# Altium PCB PCB5.PcbDoc
Units mil, origin at the board's own origin, x right, y up, seen from the top; angles counter-clockwise.
Board outline 1335 x 1970 mil, 2 copper layers (Top Layer, Bottom Layer); 19 components, 18 nets, 77 pads, 9 vias.
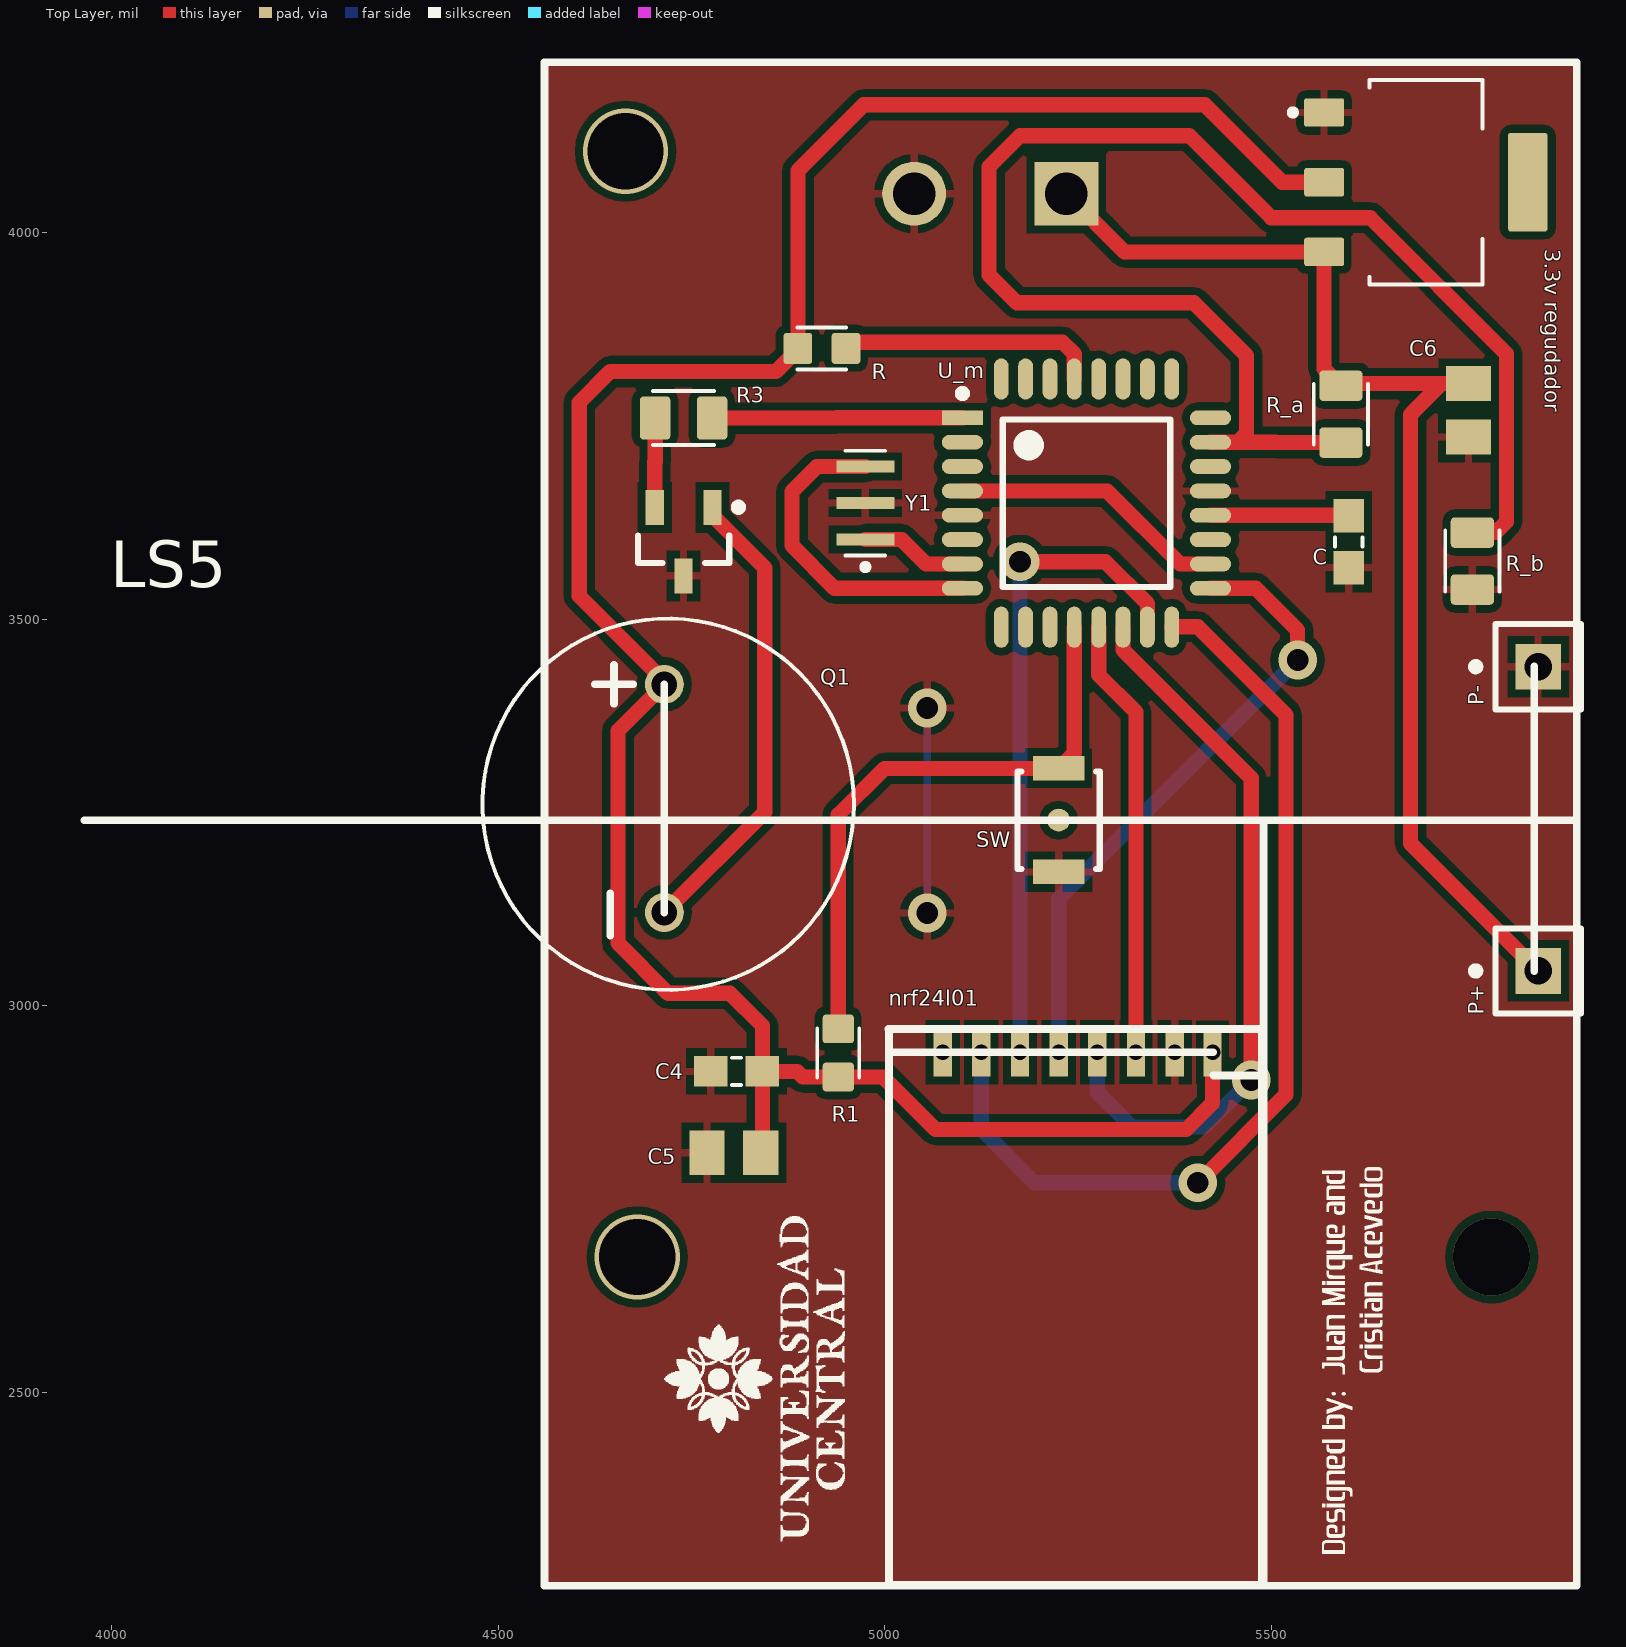
[diagram p0: Top Layer view]
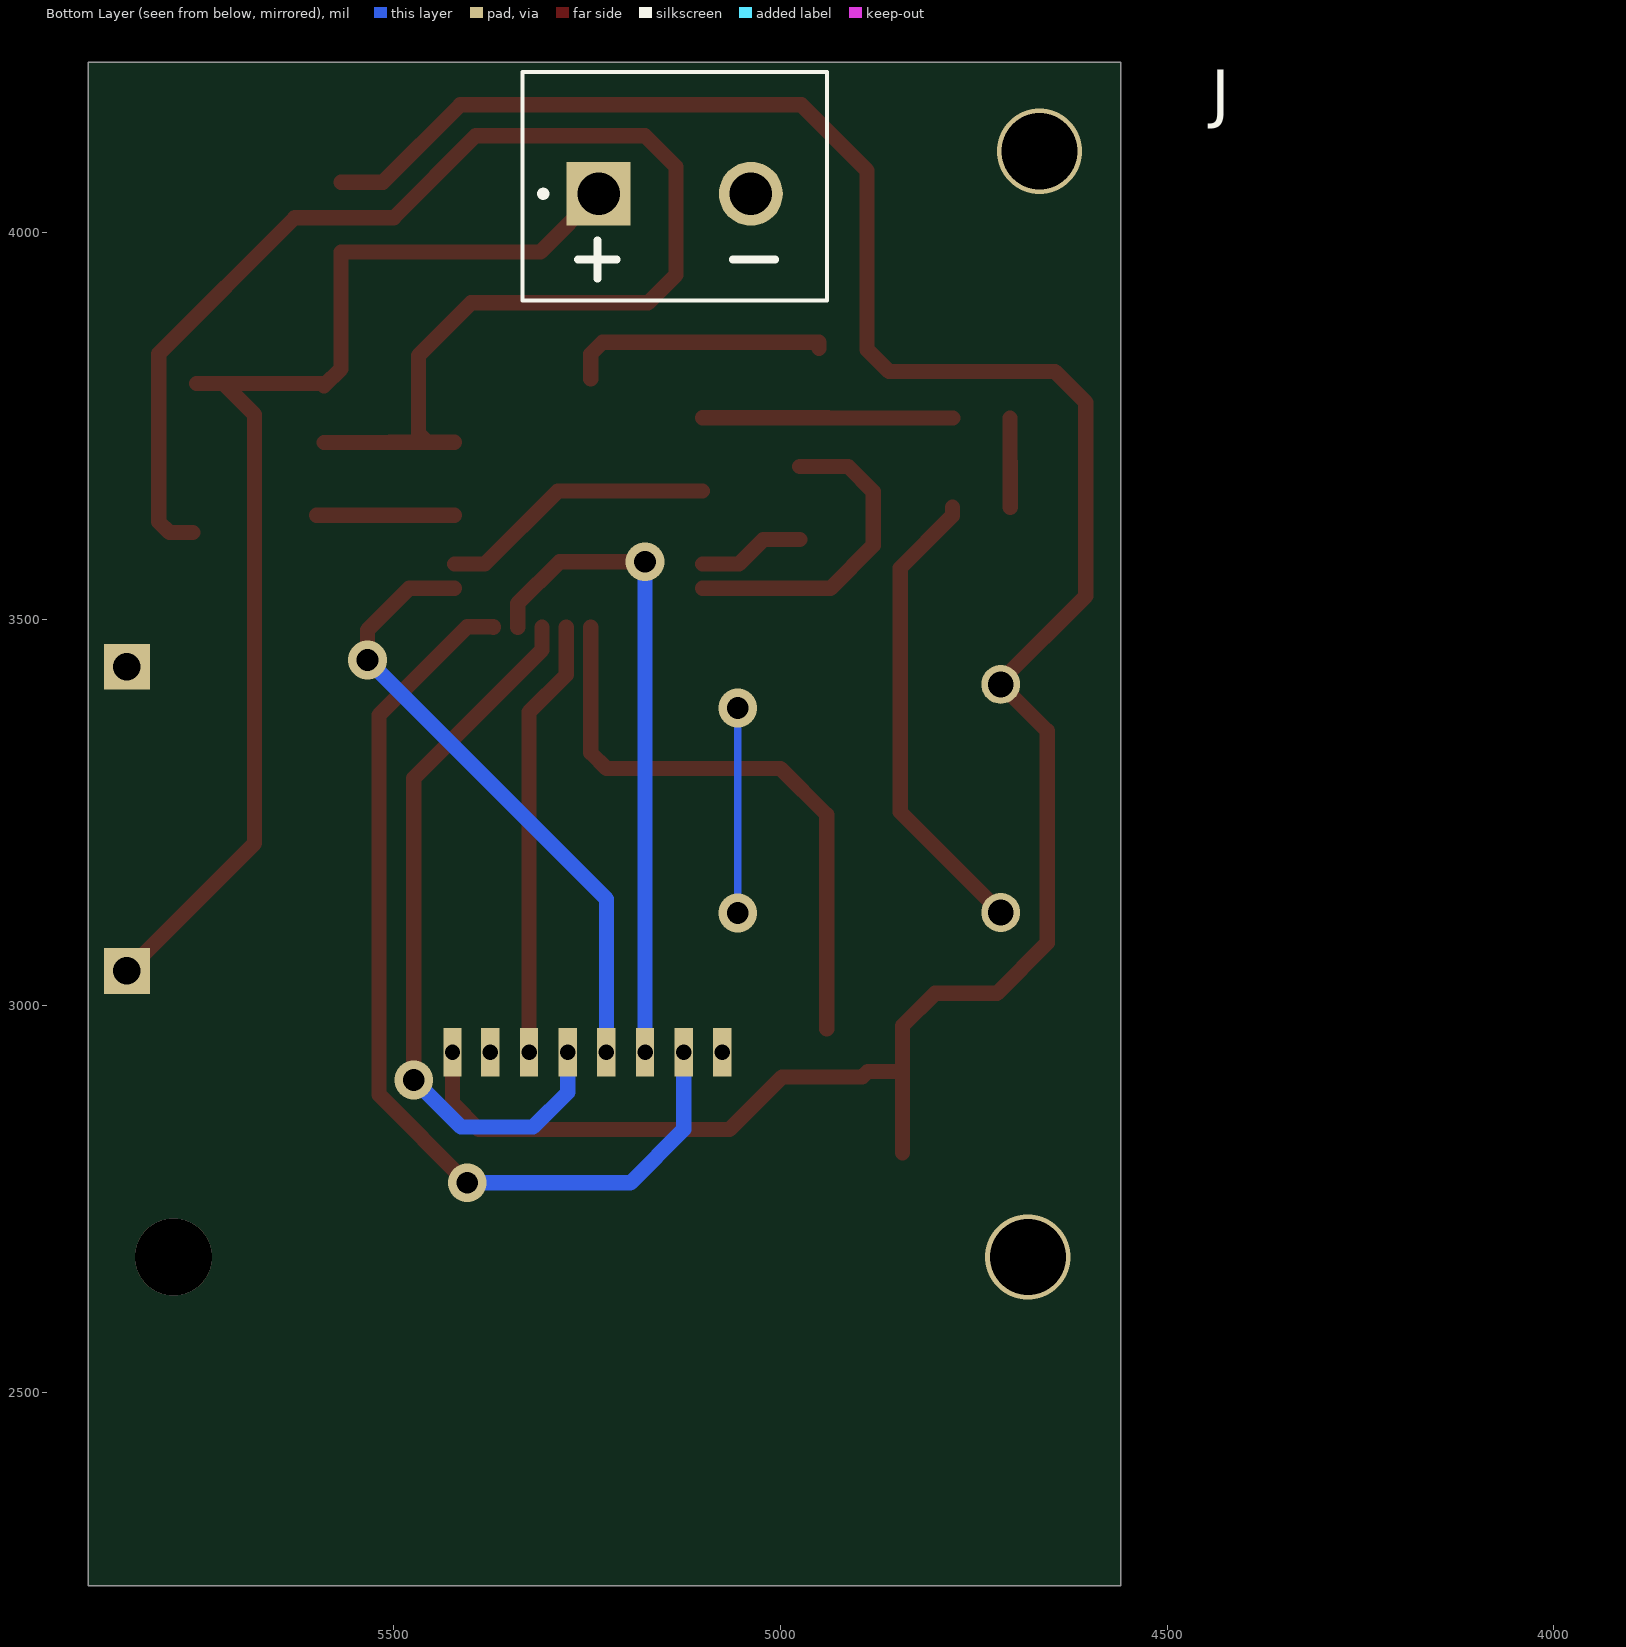
[diagram p1: Bottom Layer view, seen from below]
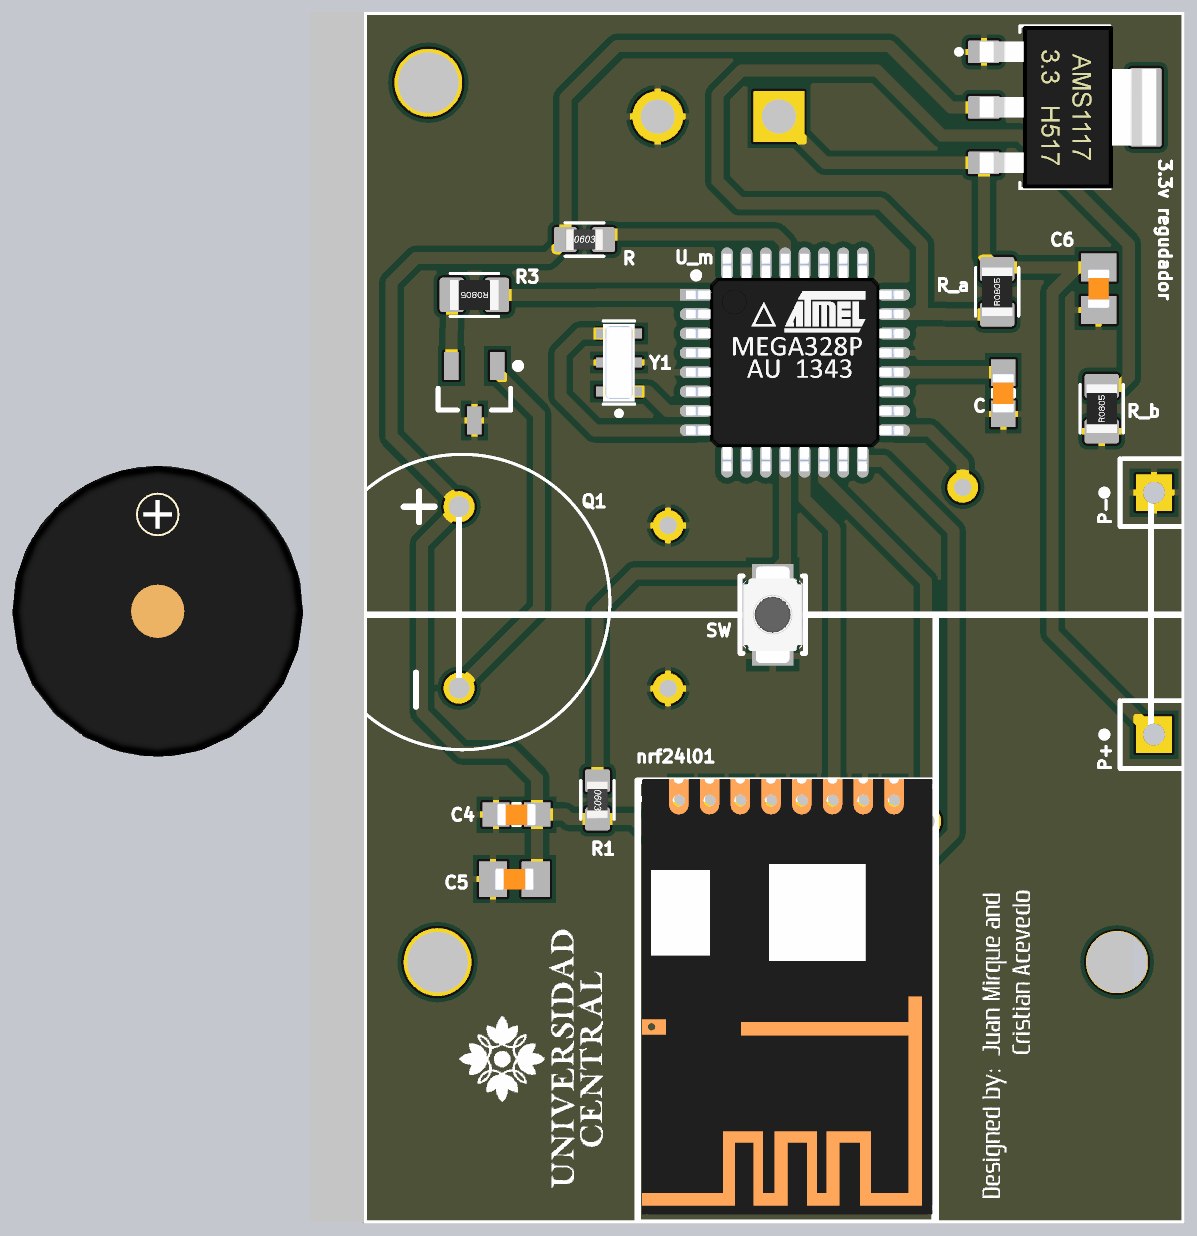
[diagram p2: 3D render of the assembled board from above, using the file's embedded part models]

## Layer stack, top to bottom
Top Solder: solder mask 0.4, Solder Resist, Dk 3.5
Top Layer: signal copper 1.4
Dielectric 1: dielectric 12.6, FR-4, Dk 4.8
Bottom Layer: signal copper 1.4
Bottom Solder: solder mask 0.4, Solder Resist, Dk 3.5

## Board outline
4560,2250 5895,2250 5895,4220 4560,4220

## Design rules (kind name [scope] priority, off if disabled: settings)
Clearance [All] p1: gap=10 ignorepadtopadclearanceinfootprint=FALSE except(0: Arc-Hole Track-Hole SMDPad-Hole THPad-Hole Via-Hole Fill-Hole Poly-Hole Region-Hole Text-Hole)
PolygonConnect [All] p1: connectstyle=Relief reliefconductorwidth=10 reliefentries=4 polygonreliefangle="90 Angle" airgapwidth=10
RoutingVias [All] p1: holewidth=28 width=50 viastyle="Through Hole" minholewidth=28 minwidth=50 maxholewidth=28 maxwidth=50
SolderMaskExpansion [All] p1: expansion=4 istentingtop=FALSE
Width [All] p1: maxlimit=19.68 minlimit=10 preferedwidth=19.68
30 further rules are at their usual default settings.

## Components (designator, comment, footprint, x,y, rotation, side; value= is the part's Value field where it differs from the comment)
"3.3v regudador" "AMS1117-3.3" SOT229P700X180-4N 5700,4065 r270 top
C "0.1uf" CAPC1608X90 5600,3600 r270 top
C4 "0.1uf" CAPC1608X90 4808.46,2915 r180 top
C5 "10uf" CAPC2012X94N 4805,2810 r0 top
C6 "0805YC103J4T2A" CAPC2012X94N 5755,3770 r90 top
J "KF301-2P" HANDSON_KF301-2P 5136.57,4050 r180 bottom
LS5 "PS1240P02BT" XDCR_PS1240P02BT 4720,3260.56 r270 top
nrf24l01 "SMD" NRF24L01 5425,2970 r270 top
P+ "Plug" PIN1 5845,3045 r90 top
P- "Plug" PIN1 5845,3438.41 r90 top
Q1 "QNPN" SOT-23B_N 4740,3600.3 r270 top
R "10K" RESC1608X50N 4918.9,3850 r0 top
R1 "220" RESC1608X50N 4940,2938.9 r270 top
R3 "100" RESC2012X65N 4740,3760 r180 top
R_a "2-2176053-0" RESC2012X65N 5590,3765 r90 top
R_b "2-2176053-0" RESC2012X65N 5760,3575 r90 top
SW "B3U-1000P-B" Omron_0_MFG 5225,3240 r90 top
U_m "ATMEGA328PB-AUR" Microchip_C04-074_IPC_C 5261,3650 r0 top
Y1 "clock" OSC_CSTCE8M00G52-R0 4975,3650 r90 top

## Footprints (in the part's own frame and the unit in brackets; to place one, negate y for a bottom-side part, rotate by r counter-clockwise, add the part's x,y. Pads: shape width x height; smd on the part's side, far side on the other; paste and mask are expansions set on the pad)
CAPC1608X90 [mm]
  rect 1.1x1 smd: 1(-0.85,0) 2(0.85,0)
  silkscreen extent -0.15,-0.45 0.15,0.45, body extent -0.8,-0.45 0.8,0.45, height 0.79
CAPC2012X94N [mm]
  rect 1.16x1.47 smd: 1(-0.88,0) 2(0.88,0)
  body extent -0.8,-0.45 0.8,0.45, height 0.79
HANDSON_KF301-2P [mm]
  rect 2.1x2.1 hole 1.4: 1(-2.5,0)
  round 2.1 hole 1.4: 2(2.5,0)
  silkscreen extent -5,-3.5 5,4, body extent -17.13,-45.68 16.87,4.32, height 10
Microchip_C04-074_IPC_C [mm]
  rect 1.355x0.486 smd paste+0 mask+0: 1(-4.075,2.8)
  rrect100% 1.355x0.486 smd paste+0 mask+0: 2(-4.075,2) 3(-4.075,1.2) 4(-4.075,0.4) 5(-4.075,-0.4) 6(-4.075,-1.2) 7(-4.075,-2) 8(-4.075,-2.8) 17(4.075,-2.8) 18(4.075,-2) 19(4.075,-1.2) 20(4.075,-0.4) 21(4.075,0.4) 22(4.075,1.2) 23(4.075,2) 24(4.075,2.8)
  rrect100% 0.486x1.355 smd paste+0 mask+0: 9(-2.8,-4.075) 10(-2,-4.075) 11(-1.2,-4.075) 12(-0.4,-4.075) 13(0.4,-4.075) 14(1.2,-4.075) 15(2,-4.075) 16(2.8,-4.075) 25(2.8,4.075) 26(2,4.075) 27(1.2,4.075) 28(0.4,4.075) 29(-0.4,4.075) 30(-1.2,4.075) 31(-2,4.075) 32(-2.8,4.075)
  silkscreen extent -4.2,-2.75 2.75,3.72, body extent -4.5,-4.5 4.5,4.5, height 1
NRF24L01 [mil] "smd"
  rect 62.99x23.62 hole 20: 1(30,-1) 2(30,-49.99) 3(30,-100) 4(30,-150) 5(30,-200) 6(30,-250) 7(30,-300) 8(30,-350)
  silkscreen extent 0,-420 719,63, body extent -3,-412 706,60, height 32
Omron_0_MFG [mm]
  rect 0.8x1.7 smd paste+0 mask+0: 1(-1.7,0) 2(1.7,0)
  round 0.75 smd paste-1000 mask+0: ""(0,0)
  silkscreen extent -1.6,-1.35 1.6,1.35, body extent -2,-1.25 2,1.25, height 2.26
OSC_CSTCE8M00G52-R0 [mm]
  rect 0.4x1.9 smd: 1(-1.2,0) 2(0,0) 3(1.2,0)
  silkscreen extent -2.2,-0.65 1.72,0.65, body extent -1.6,-0.65 1.6,0.65, height 0.8
PIN1 [mm] "Connector; Plug"
  rect 1.5x1.5 hole 0.9: 1(0,0)
  silkscreen extent -1.4,-1.4 1.4,2.17
RESC1608X50N [mm]
  rrect20% 0.94x1.02 smd: 1(-0.79,0) 2(0.79,0)
  silkscreen extent -0.8,-0.69 0.8,0.69, body extent -0.78,-0.43 0.78,0.43, height 0.49
RESC2012X65N [mm]
  rrect25% 1x1.42 smd: 1(-0.935,0) 2(0.935,0)
  silkscreen extent -1,-0.89 1,0.89, body extent -1,-0.62 1,0.62, height 0.6
SOT229P700X180-4N [mm]
  rrect15% 0.93x1.31 smd: 1(-2.29,-3.345) 2(0,-3.345) 3(2.29,-3.345)
  rrect15% 3.24x1.31 smd: 4(0,3.345)
  silkscreen extent -3.36,-4.47 3.36,1.86, body extent -3.35,-3.52 3.35,3.78, height 1.91
SOT-23B_N [mm] "SOT23, 3-Leads, Body 2.9x1.3mm, Pitch 0.95mm, Lead Span 2.4mm, IPC Medium Density"
  rect 1.15x0.6 smd: 1(-1.125,0.95) 2(-1.125,-0.95) 3(1.125,0)
  silkscreen extent -1.25,-1.5 0.7,1.93, body extent -0.7,-1.5 0.7,1.5, height 1.14
XDCR_PS1240P02BT [mm]
  round 1.28 hole 0.85: 1(-3.937,-0.127) 2(3.556,-0.127)
  silkscreen extent -6.1,-6.1 6.1,6.1, body extent -5.62,-18.57 6.38,-6.57

## Part data
"3.3v regudador": "Sot223/Pkg 1-Amp 3.3-Volt Low Drop Out Voltage Regulatator", Package=None, Availability=Unavailable, MF="Advanced Monolithic Systems", MP=AMS1117-3.3, Price=None, SnapEDA_Link=https://www.snapeda.com/parts/AMS1117-3.3/Advanced%20Monolithic%20Systems/view-part/53450/?ref=snap
C C4: library part CC0603KRX7R9BB104, "0.1ÂµF Â±10% 50V Ceramic Capacitor X7R 0603 _1608 Metric_", Package="0603 Yageo", Digi-Key_Part_Number=311-1344-1-ND, Digi-Key_Purchase_URL=https://www.digikey.com/product-detail/en/yageo/CC0603KRX7R9BB104/311-1344-1-ND/2103128?utm_source=snapeda&utm_medium=aggregator&utm_campaign=symbol, MF=Yageo, MP=CC0603KRX7R9BB104, SnapEDA_Link=https://www.snapeda.com/parts/CC0603KRX7R9BB104/Yageo/view-part/78680/?ref=snap
C5: library part 0805YC103J4T2A, "10000pF Â±5% 16V Ceramic Capacitor X7R 0805 _2012 Metric_", Package="2012 AVX", Availability=Unavailable, MF=AVX, MP=0805YC103J4T2A, Price=None, SnapEDA_Link=https://www.snapeda.com/parts/0805YC103J4T2A/AVX/view-part/606803/?ref=snap
C6: "10000pF Â±5% 16V Ceramic Capacitor X7R 0805 _2012 Metric_", Package="2012 AVX", Availability=Unavailable, MF=AVX, MP=0805YC103J4T2A, Price=None, SnapEDA_Link=https://www.snapeda.com/parts/0805YC103J4T2A/AVX/view-part/606803/?ref=snap
J: "2 Pin Terminal Block 5mm Pitch", Package=Package, Availability=Unavailable, MF="Handson Technology", MP=KF301-2P, Price=None, SnapEDA_Link=https://www.snapeda.com/parts/KF301-2P/Handson%20Technology/view-part/4276957/?ref=snap
LS5: "Buzzers Transducer, Externally Driven Piezo 3V 4kHz 60dB @ 3V, 10cm Through Hole PC Pins", Package="2020 TDK", Availability=Unavailable, MF=TDK, MP=PS1240P02BT, Price=None, SnapEDA_Link=https://www.snapeda.com/parts/PS1240P02BT/TDK/view-part/53420/?ref=snap
nrf24l01: library part nrf24l01_smd, Supplier Part Number 1=311-0.0ERCT-ND, Supplier 1=Digi-Key
Q1: "NPN Bipolar Transistor", LatestRevisionDate=29-May-2009, LatestRevisionNote="IPC-7351 Footprint Added.", PackageDescription="3-Pin SOT-23 Package 0.95 mm Pitch, 2.4 mm Lead Span", PackageReference=SOT-23B, PackageVersion=Aug-1999, Published=8-Jun-2000, Publisher="Altium Limited"
R R1: library part RP73D1J13RBTDG, "Res, Thin Film, 13r, 0.1%, 0.1w, 0603", Package="0603 TE Connectivity / AMP", Availability=Unavailable, MF="TE Connectivity", MP=RP73D1J13RBTDG, Price=None, SnapEDA_Link=https://www.snapeda.com/parts/RP73D1J13RBTDG/TE%20Connectivity/view-part/970906/?ref=snap, TE_purchase_URL=https://www.te.com/usa-en/product-RP73D1J13RBTDG.html?te_bu=Cor&te_type=disp&te_campaign=seda_glo_cor-seda-global-disp-prtnr-fy19-seda-model-bom-cta_sma-317_1&elqCampaignId=32493
R3: library part 2-2176053-0, "RES 0.33 OHM 1% 1/4W 0805", Package=0805, Power_Rating=".25 W", Resistance=.33, Tolerance=1%, Availability=Unavailable, EU_RoHS_Compliance="Compliant with Exemptions", MF="TE Connectivity", MP=2-2176053-0, Price=None, SnapEDA_Link=https://www.snapeda.com/parts/2-2176053-0/TE%20Connectivity/view-part/2214508/?ref=snap
R_a R_b: "RES 0.33 OHM 1% 1/4W 0805", Package=0805, Power_Rating=".25 W", Resistance=.33, Tolerance=1%, Availability=Unavailable, EU_RoHS_Compliance="Compliant with Exemptions", MF="TE Connectivity", MP=2-2176053-0, Price=None, SnapEDA_Link=https://www.snapeda.com/parts/2-2176053-0/TE%20Connectivity/view-part/2214508/?ref=snap
Y1: library part CSTCE8M00G52-R0, "8MHz Ceramic Resonator Built in Capacitor 10pF Â±0.2% -20Â°C ~ 80Â°C Surface Mount", Package="Surface Mount Murata Electronics North America", Availability=Bad, Check_prices=https://www.snapeda.com/parts/CSTCE8M00G52-R0/Murata%20Electronics%20North%20America/view-part/234504/?ref=eda, MF=Murata, MP=CSTCE8M00G52-R0, Price=None, SnapEDA_Link=https://www.snapeda.com/parts/CSTCE8M00G52-R0/Murata%20Electronics%20North%20America/view-part/234504/?ref=snap
P+ P-: LatestRevisionDate=17-Jul-2002, LatestRevisionNote="Re-released for DXP Platform.", Publisher="Altium Limited"

## Via types
v1: diameter 50, hole 28, Top Layer to Bottom Layer, 6 vias
v2: diameter 110.24, hole 98.43, Top Layer to Bottom Layer, 2 vias
v3: diameter 99.61, hole 99.61, Top Layer to Bottom Layer, 1 vias

## Nets (pads, with @x,y where several pads share a name; then routed paths per layer and width w, separated by ;. In a path a pad name is that pad's centre, name@x,y a point inside that pad or via, vN(x,y) a via of type N, cw(c..) or ccw(c..) an arc to the next point about the centre after c; other vN are vias at no path point)
3v3: "3.3v regudador.2" C4.1 C5.2 LS5.1 nrf24l01.1 R1.2 R.1 | length 3157.8
  Top Layer w19.68: C5.2@4841.93,2810 C4.1 ; nrf24l01.1 5424,2874 5390,2840 5065.8,2840 4998,2907.8 R1.2 4894.2,2907.8 4887,2915 C4.1 ; 5568.31,4065 5514,4065 5414,4165 4972.8,4165 4887.8,4080 R.1 4887.8,3848.43 4859.37,3820 4645,3820 4605,3780 4605,3530 4715,3420 LS5.1 4655,3355.56 4655,3081 4720,3016 4800,3016 4841.93,2974.07 C4.1
GND: "3.3v regudador.1" C4.2 C5.1 C6.1 C.2 J.2 nrf24l01.2 P-.1 Q1.3 R_b.1 SW.1 U_m.5 U_m.21 Y1.2 | length 255
  Bottom Layer w10: v1(5055,3120) v1@5055,3375
  other v1: 5055,3385
"Net3.3v regudador_3": "3.3v regudador.3" C6.2 J.1 P+.1 R_a.2 | length 1556
  Top Layer w19.68: J.1 5310.16,3974.84 5568.31,3974.84 5568.31,3823.5 R_a.2 ; R_a.2@5590,3804.65 5720,3804.65 ; C6.2 5720,3804.65 ; P+.1 5680,3210 5680,3764.65 5720,3804.65
NetC_1: C.1 U_m.20 | length 178.6
  Top Layer w19.68: U_m.20 C.1@5600,3634.25
NetLS5_2: LS5.2 Q1.1 | length 605.9
  Top Layer w19.68: LS5.2 4845,3250.56 4845,3566.16 4779.37,3631.79 4777.4,3633.76 Q1.1
Netnrf24l01_3: nrf24l01.3 U_m.13 | length 569.5
  Top Layer w19.68: U_m.13 5276.75,3428 5325,3379.75 nrf24l01.3
Netnrf24l01_4: nrf24l01.4 U_m.14 | length 949.1
  Top Layer w19.68: U_m.14 5308.24,3460 5474,3294.24 v1(5474,2904)
  Bottom Layer w19.68: nrf24l01.4 5275,2888 5320,2843 5413,2843 v1(5474,2904)
Netnrf24l01_5: nrf24l01.5 U_m.17 | length 808.7
  Top Layer w19.68: U_m.17 5480,3539.76 5534,3485.76 v1(5534,3447)
  Bottom Layer w19.68: nrf24l01.5 5225,3138 v1(5534,3447)
Netnrf24l01_6: nrf24l01.6 U_m.15 | length 851.6
  Top Layer w19.68: v1(5175,3574) 5285.74,3574 5339.74,3520 U_m.15
  Bottom Layer w19.68: nrf24l01.6 v1(5175,3574)
Netnrf24l01_7: nrf24l01.7 U_m.16 | length 1256.2
  Top Layer w19.68: U_m.16 5371.23,3490 5405,3490 5519,3376 5519,2885 v1(5405,2771)
  Bottom Layer w19.68: nrf24l01.7 5125,2840 5194,2771 v1(5405,2771)
NetQ1_2: Q1.2 R3.2 | length 115.7
  Top Layer w19.68: Q1.2 4702.6,3703.13 4703.19,3703.72 R3.2
NetR1_1: R1.1 SW.2 U_m.12 | length 777.8
  Top Layer w19.68: R1.1 4940,3246.93 5000,3306.93 SW.2 5245.25,3327.18 U_m.12
NetR3_1: R3.1 U_m.1 | length 323.8
  Top Layer w19.68: R3.1 4938,3760 4938.24,3760.24 U_m.1
NetR_2: R.2 U_m.29 | length 341.9
  Top Layer w19.68: R.2 4950,3858 5230,3858 5245.25,3842.75 U_m.29
NetR_a_1: R_a.1 R_b.2 U_m.23 | length 1871.1
  Top Layer w19.68: U_m.23 5456.74,3728.74 ; R_a.1 5505.55,3728.19 5505,3728.74 5456.74,3728.74 ; R_b.2 5790,3611.81 5804,3625.81 5804,3843 5628,4019 5500,4019 5394,4125 5175,4125 5135,4085 5135,3945 5171,3909 5400,3909 5468,3841 5468,3740 5456.74,3728.74
NetU_m_4: U_m.4 U_m.18 | length 360
  Top Layer w19.68: U_m.4 5287.77,3665.75 5382.26,3571.26 U_m.18
NetU_m_7: U_m.7 Y1.1 | length 138.6
  Top Layer w19.68: Y1.1 5022,3602.76 5053.5,3571.26 U_m.7
NetU_m_8: U_m.8 Y1.3 | length 421.8
  Top Layer w19.68: Y1.3 4912.24,3697.24 4880,3665 4880,3595 4935.24,3539.76 U_m.8
pads on no net: "3.3v regudador.4" nrf24l01.8 SW. U_m.2 U_m.3 U_m.6 U_m.9 U_m.10 U_m.11 U_m.19 U_m.22 U_m.24 U_m.25 U_m.26 U_m.27 U_m.28 U_m.30 U_m.31 U_m.32
copper on no net:
  other v2: 4680,2675 4665,4105
  other v3: 5785,2675

## Polygon pours and split planes (outlines as drawn)
GND on Top Layer "GND_L01_P000" (solid, pour order 0): 5895,4220 5890,4215 5890,2250 4560,2250 4560,4220

## Silkscreen, mask and mechanical layers (free items; w line width, h text height)
Top Overlay:
  drawing of 71 lines, arcs and shapes, not listed